# Altium PCB TRK.PcbDoc
Units mm, origin at the board's own origin, x right, y up, seen from the top; angles counter-clockwise.
Board outline 30 x 30 mm, 2 copper layers (Top Layer, Bottom Layer); 4 components, 0 nets, 132 pads, 0 vias.
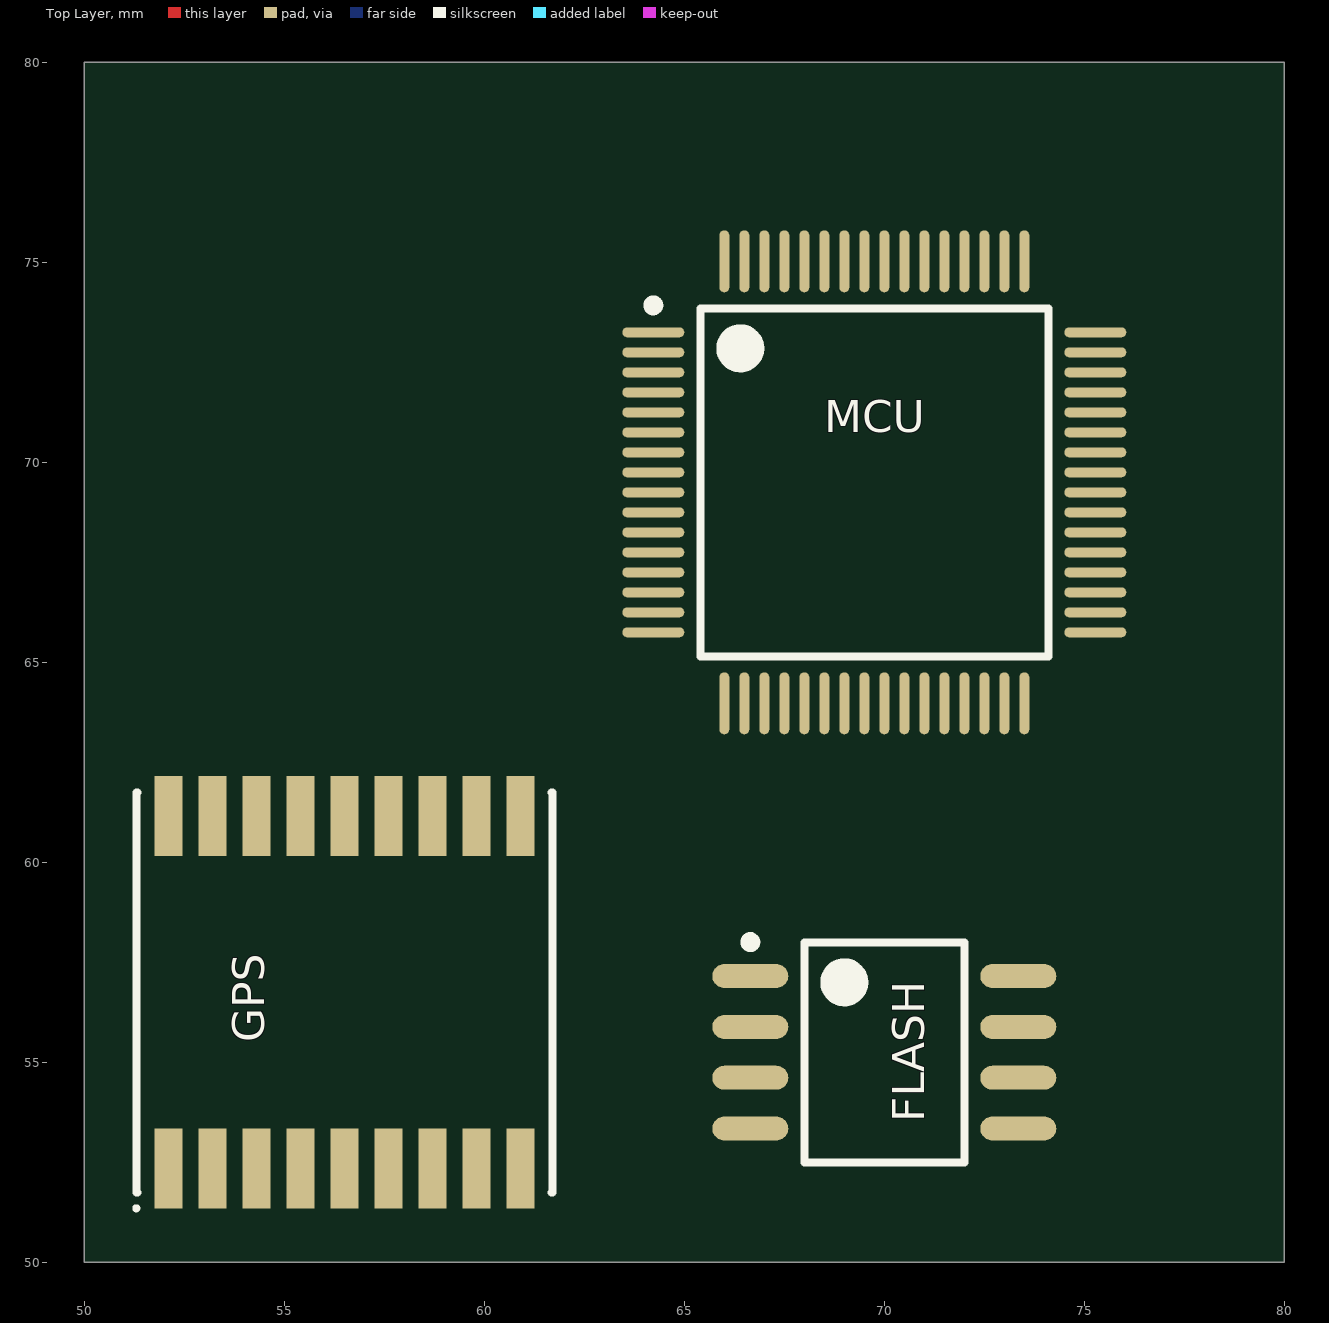
[diagram p0: Top Layer view]
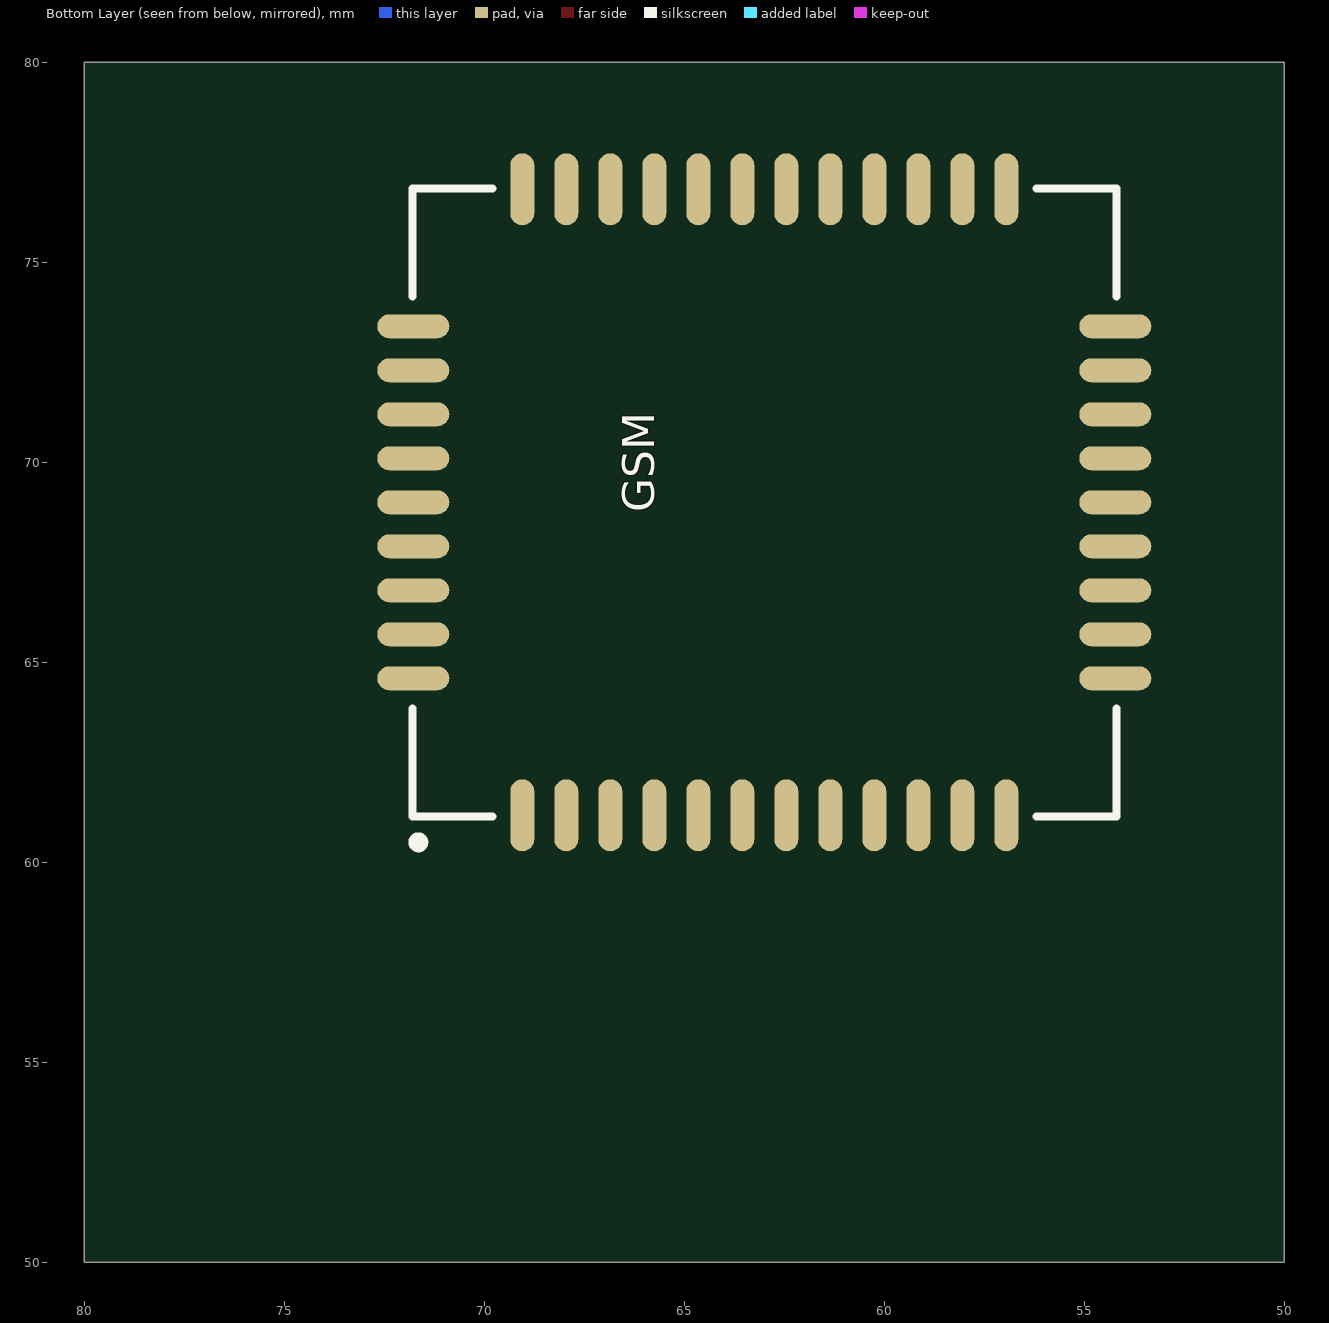
[diagram p1: Bottom Layer view, seen from below]

## Layer stack, top to bottom
Top Solder: solder mask 0.0102, Solder Resist, Dk 3.5
Top Layer: signal copper 0.0356
Dielectric 1: dielectric 0.32, FR-4, Dk 4.8
Bottom Layer: signal copper 0.0356
Bottom Solder: solder mask 0.0102, Solder Resist, Dk 3.5

## Board outline
50,50 50,80 80,80 80,50

## Design rules (kind name [scope] priority, off if disabled: settings)
Clearance [All] p1: gap=0.254
PolygonConnect [All] p1: connectstyle=Relief reliefconductorwidth=0.254 reliefentries=4 polygonreliefangle="90 Angle" airgapwidth=0.254
RoutingVias [All] p1: holewidth=0.711 width=1.27 viastyle="Through Hole" minholewidth=0.711 minwidth=1.27 maxholewidth=0.711 maxwidth=1.27
SolderMaskExpansion [All] p1: expansion=0.102
Width [All] p1: maxlimit=0.254 minlimit=0.254 preferedwidth=0.254
30 further rules are at their usual default settings.

## Components (designator, comment, footprint, x,y, rotation, side; value= is the part's Value field where it differs from the comment)
FLASH "Comment" SO8W_L 70,55.25 r0 top
GPS "Comment" SIM28ML 56.5,56.75 r90 top
GSM "Comment" SIM800C 63,69 r90 bottom
MCU "Comment" LQFP64_L 69.75,69.5 r0 top

## Footprints (in the part's own frame and the unit in brackets; to place one, negate y for a bottom-side part, rotate by r counter-clockwise, add the part's x,y. Pads: shape width x height; smd on the part's side, far side on the other; paste and mask are expansions set on the pad)
LQFP64_L [mm] "Thin QFP, 64-Leads, Body 10x10mm, Pitch 0.5mm, IPC High Density"
  oval 1.55x0.25 smd: 1(-5.525,3.75) 2(-5.525,3.25) 3(-5.525,2.75) 4(-5.525,2.25) 5(-5.525,1.75) 6(-5.525,1.25) 7(-5.525,0.75) 8(-5.525,0.25) 9(-5.525,-0.25) 10(-5.525,-0.75) 11(-5.525,-1.25) 12(-5.525,-1.75) 13(-5.525,-2.25) 14(-5.525,-2.75) 15(-5.525,-3.25) 16(-5.525,-3.75) 33(5.525,-3.75) 34(5.525,-3.25) 35(5.525,-2.75) 36(5.525,-2.25) 37(5.525,-1.75) 38(5.525,-1.25) 39(5.525,-0.75) 40(5.525,-0.25) 41(5.525,0.25) 42(5.525,0.75) 43(5.525,1.25) 44(5.525,1.75) 45(5.525,2.25) 46(5.525,2.75) 47(5.525,3.25) 48(5.525,3.75)
  oval 0.25x1.55 smd: 17(-3.75,-5.525) 18(-3.25,-5.525) 19(-2.75,-5.525) 20(-2.25,-5.525) 21(-1.75,-5.525) 22(-1.25,-5.525) 23(-0.75,-5.525) 24(-0.25,-5.525) 25(0.25,-5.525) 26(0.75,-5.525) 27(1.25,-5.525) 28(1.75,-5.525) 29(2.25,-5.525) 30(2.75,-5.525) 31(3.25,-5.525) 32(3.75,-5.525) 49(3.75,5.525) 50(3.25,5.525) 51(2.75,5.525) 52(2.25,5.525) 53(1.75,5.525) 54(1.25,5.525) 55(0.75,5.525) 56(0.25,5.525) 57(-0.25,5.525) 58(-0.75,5.525) 59(-1.25,5.525) 60(-1.75,5.525) 61(-2.25,5.525) 62(-2.75,5.525) 63(-3.25,5.525) 64(-3.75,5.525)
  silkscreen extent -5.65,-4.35 4.35,4.55, body extent -5,-5 5,5, height 1.6
SIM28ML [mm] "SON, 18-Leads, Body 10.10x9.70mm, Pitch 1.10mm, IPC Medium Density"
  rect 2x0.7 smd: 1(-4.405,4.4) 2(-4.405,3.3) 3(-4.405,2.2) 4(-4.405,1.1) 5(-4.405,0) 6(-4.405,-1.1) 7(-4.405,-2.2) 8(-4.405,-3.3) 9(-4.405,-4.4) 10(4.405,-4.4) 11(4.405,-3.3) 12(4.405,-2.2) 13(4.405,-1.1) 14(4.405,0) 15(4.405,1.1) 16(4.405,2.2) 17(4.405,3.3) 18(4.405,4.4)
  silkscreen extent -5.45,-5.2 5,5.25, body extent -4.86,-5.05 4.86,5.05, height 2.56
SIM800C [mm] "PQFN, 42-Leads, Body 15.70x17.60mm, Pitch 1.10mm, Thermal Pad 4.00x2.20mm, IPC Medium Density"
  oval 1.8x0.6 smd: 1(-7.825,6.05) 2(-7.825,4.95) 3(-7.825,3.85) 4(-7.825,2.75) 5(-7.825,1.65) 6(-7.825,0.55) 7(-7.825,-0.55) 8(-7.825,-1.65) 9(-7.825,-2.75) 10(-7.825,-3.85) 11(-7.825,-4.95) 12(-7.825,-6.05) 22(7.825,-6.05) 23(7.825,-4.95) 24(7.825,-3.85) 25(7.825,-2.75) 26(7.825,-1.65) 27(7.825,-0.55) 28(7.825,0.55) 29(7.825,1.65) 30(7.825,2.75) 31(7.825,3.85) 32(7.825,4.95) 33(7.825,6.05)
  oval 0.6x1.8 smd: 13(-4.4,-8.775) 14(-3.3,-8.775) 15(-2.2,-8.775) 16(-1.1,-8.775) 17(0,-8.775) 18(1.1,-8.775) 19(2.2,-8.775) 20(3.3,-8.775) 21(4.4,-8.775) 34(4.4,8.775) 35(3.3,8.775) 36(2.2,8.775) 37(1.1,8.775) 38(0,8.775) 39(-1.1,8.775) 40(-2.2,8.775) 41(-3.3,8.775) 42(-4.4,8.775)
  silkscreen extent -8.62,-8.8 7.85,8.8, body extent -7.8,-8.8 7.9,8.8, height 2.3
SO8W_L [mm] "SOP, 8-Leads, Body 5.3x5.3mm, Pitch 1.27mm, IPC High Density"
  oval 1.9x0.6 smd: 1(-3.35,1.905) 2(-3.35,0.635) 3(-3.35,-0.635) 4(-3.35,-1.905) 5(3.35,-1.905) 6(3.35,-0.635) 7(3.35,0.635) 8(3.35,1.905)
  silkscreen extent -3.47,-2.75 2,2.88, body extent -2.73,-2.75 2.73,2.75, height 2.13

## Nets (pads, with @x,y where several pads share a name; then routed paths per layer and width w, separated by ;. In a path a pad name is that pad's centre, name@x,y a point inside that pad or via, vN(x,y) a via of type N, cw(c..) or ccw(c..) an arc to the next point about the centre after c; other vN are vias at no path point)
pads on no net: FLASH.1 FLASH.2 FLASH.3 FLASH.4 FLASH.5 FLASH.6 FLASH.7 FLASH.8 GPS.1 GPS.2 GPS.3 GPS.4 GPS.5 GPS.6 GPS.7 GPS.8 GPS.9 GPS.10 GPS.11 GPS.12 GPS.13 GPS.14 GPS.15 GPS.16 GPS.17 GPS.18 GSM.1 GSM.2 GSM.3 GSM.4 GSM.5 GSM.6 GSM.7 GSM.8 GSM.9 GSM.10 GSM.11 GSM.12 GSM.13 GSM.14 GSM.15 GSM.16 GSM.17 GSM.18 GSM.19 GSM.20 GSM.21 GSM.22 GSM.23 GSM.24 GSM.25 GSM.26 GSM.27 GSM.28 GSM.29 GSM.30 GSM.31 GSM.32 GSM.33 GSM.34 GSM.35 GSM.36 GSM.37 GSM.38 GSM.39 GSM.40 GSM.41 GSM.42 MCU.1 MCU.2 MCU.3 MCU.4 MCU.5 MCU.6 MCU.7 MCU.8 MCU.9 MCU.10 MCU.11 MCU.12 MCU.13 MCU.14 MCU.15 MCU.16 MCU.17 MCU.18 MCU.19 MCU.20 MCU.21 MCU.22 MCU.23 MCU.24 MCU.25 MCU.26 MCU.27 MCU.28 MCU.29 MCU.30 MCU.31 MCU.32 MCU.33 MCU.34 MCU.35 MCU.36 MCU.37 MCU.38 MCU.39 MCU.40 MCU.41 MCU.42 MCU.43 MCU.44 MCU.45 MCU.46 MCU.47 MCU.48 MCU.49 MCU.50 MCU.51 MCU.52 MCU.53 MCU.54 MCU.55 MCU.56 MCU.57 MCU.58 MCU.59 MCU.60 MCU.61 MCU.62 MCU.63 MCU.64

## Silkscreen, mask and mechanical layers (free items; w line width, h text height)
Mechanical 1:
  the board outline again, w0.15